# Altium PCB Face_HM1V0.PcbDoc
Units mm, origin at the board's own origin, x right, y up, seen from the top; angles counter-clockwise.
Board outline 54 x 13.7 mm, 2 copper layers (Top Layer, Bottom Layer), stack 1.571 mm thick; 18 components, 17 nets, 75 pads, 98 vias.
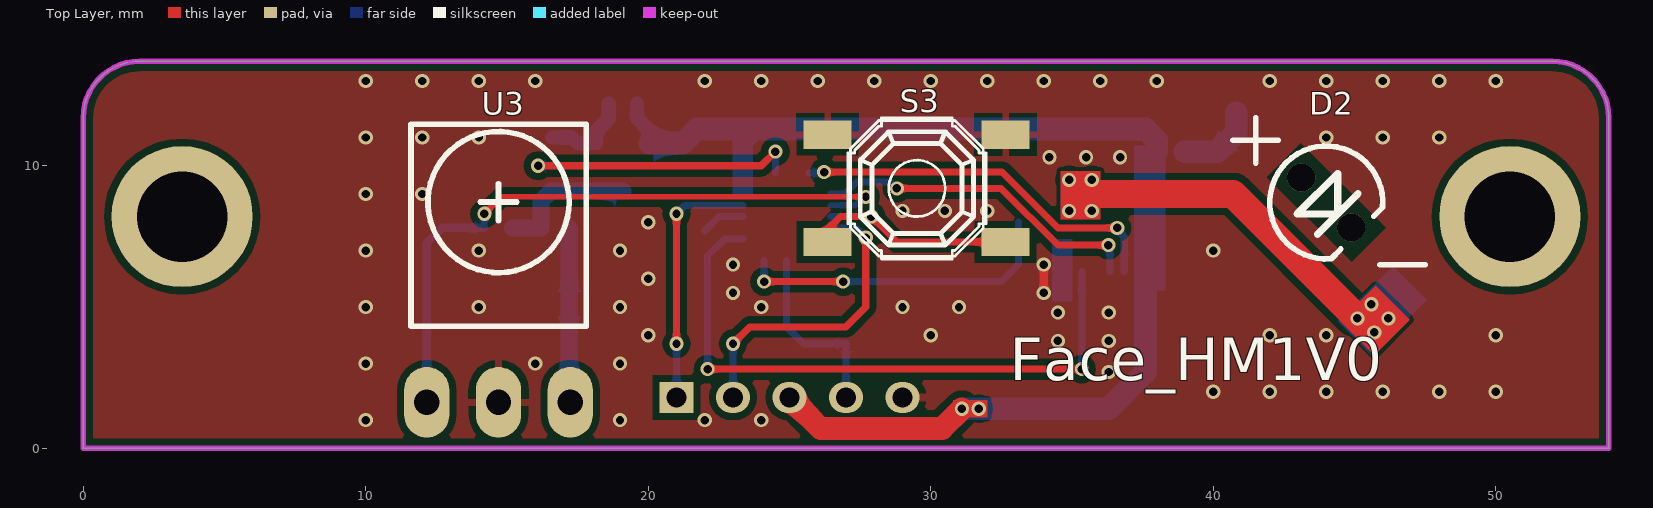
[diagram p0: Top Layer view]
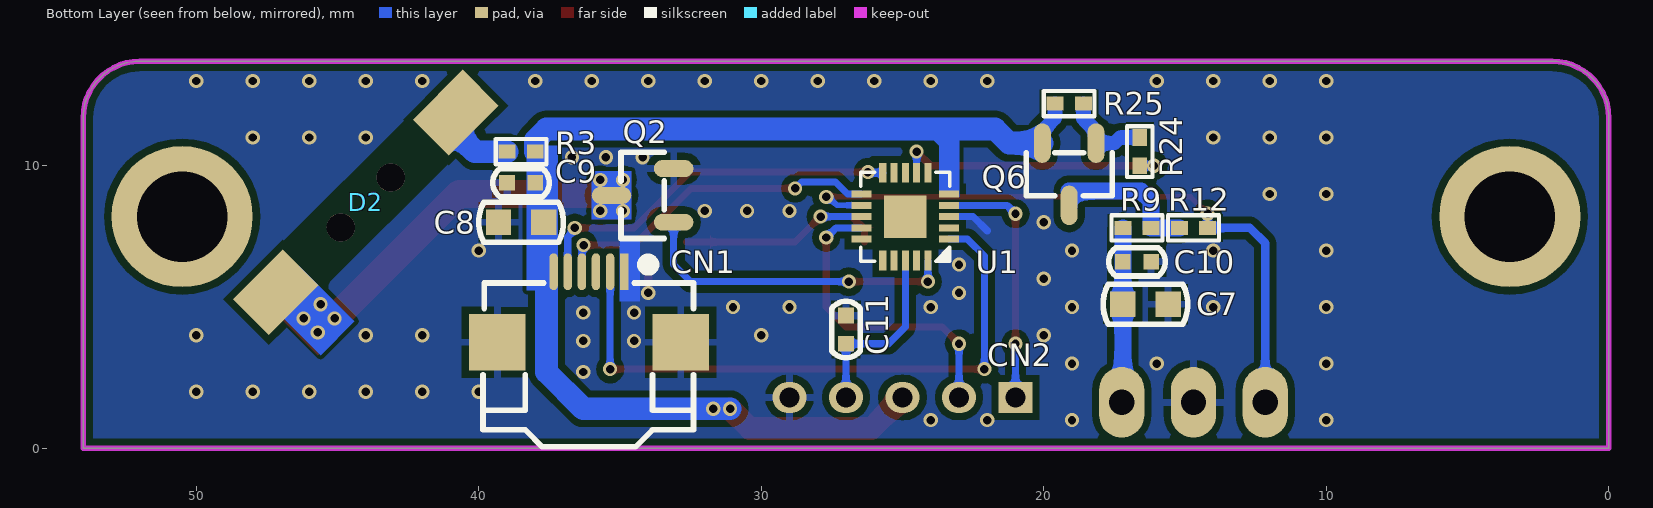
[diagram p1: Bottom Layer view, seen from below]

## Layer stack, top to bottom
Top Solder: solder mask 0.0102, Solder Resist, Dk 3.5
Top Layer: signal copper 0.0356
Dielectric 1: dielectric 1.5, FR-4, Dk 4.8
Bottom Layer: signal copper 0.0356
Bottom Solder: solder mask 0.0102, Solder Resist, Dk 3.5

## Board outline
0,0 54,0 54,11.7 ccw(c52,11.7) 52,13.7 2,13.7 ccw(c2,11.7) 0,11.7

## Design rules (kind name [scope] priority, off if disabled: settings)
Clearance [All] p1: gap=0.15 ignorepadtopadclearanceinfootprint=FALSE except(0.254: Arc-Poly Track-Poly SMDPad-Poly THPad-Poly Via-Poly Fill-Poly Poly-Poly)
ComponentClearance [All] p1: gap=0 collisioncheckmode=3 verticalgap=0 showdistances=FALSE
Height [All] p1: minheight=0 maxheight=30 prefheight=0
HoleSize [All] p1: absolutevalues=TRUE maxlimit=5 minlimit=0.025 maxpercent=80.000 minpercent=20.000
HoleToHoleClearance [All] p1: gap=0 allowstackedmicrovias=TRUE
MinimumSolderMaskSliver [All] p1: minsoldermaskwidth=0
PolygonConnect ViaPoly [IsVia] p1: connectstyle=Direct reliefconductorwidth=0.254 reliefentries=4 polygonreliefangle="90 Angle" airgapwidth=0.254
PolygonConnect [All] p2: connectstyle=Relief reliefconductorwidth=0.254 reliefentries=4 polygonreliefangle="90 Angle" airgapwidth=0.254
RoomDefinition Face_HM1V0 [InComponentClass('Face_HM1V0')] p1: confinementstyle=ConfineIn formatcopy=TRUE lockcomponents=FALSE outline 0,-1.3 54,-1.3 54,15.7 0,15.7
RoutingVias [All] p1: holewidth=0.3 width=0.5 viastyle="Through Hole" minholewidth=0.3 minwidth=0.5 maxholewidth=1 maxwidth=2
SilkToSilkClearance [All] p1: silktosilkclearance=0
SilkToSolderMaskClearance [IsPad] p1: minsilkscreentomaskgap=0 clearancetoexposedcopper=TRUE
SolderMaskExpansion viaSolderMask [IsVia] p1: expansion=0 istentingtop=FALSE
SolderMaskExpansion [All] p2: expansion=0.1 istentingtop=FALSE
UnRoutedNet [All] p1: checkbadconnections=TRUE
Width [All] p1: maxlimit=2 minlimit=0.2 preferedwidth=0.3
22 further rules are at their usual default settings.

## Components (designator, comment, footprint, x,y, rotation, side; value= is the part's Value field where it differs from the comment)
C7 "10uf ±10% 6.3V X7R 0603 ROSH ROHS" C0603 16.4,5.1 r0 bottom
C8 "10uf ±10% 6.3V X7R 0603 ROSH ROHS" C0603 38.5,8 r180 bottom
C9 "100nF/6.3V 10% 0402 X7R ROHS" C0402 38.5,9.4 r0 bottom
C10 "100nF/6.3V 10% 0402 X7R ROHS" C0402 16.7,6.6 r180 bottom
C11 "100nF/6.3V 10% 0402 X7R ROHS" C0402 27,4.2 r90 bottom
CN1 "NC/Header" HD2.0_5P 21,1.8 r0 bottom
CN2 "FPC6_0.5" FPC0.5_6P_STRAIGHT 37.1,5 r0 bottom
D2 "IR204C-A" "LD5.0_1 - duplicate" 44,8.7 r135 top
Q2 "SK2302AA" SOT-23-3 34.2,8.95 r90 bottom
Q6 "AO3400" SOT-23-3 19.1,9.7 r0 bottom
R3 "27R 5% 1/16W 0402 ROHS" R0402 38.5,10.5 r0 bottom
R9 "27R 5% 1/16W 0402 ROHS" R0402 16.7,7.8 r0 bottom
R12 "20K 5% 1/16W 0402 ROHS" R0402 14.7,7.8 r180 bottom
R24 "1K 5% 1/16W 0402 ROHS" R0402 16.6,10.5 r90 bottom
R25 "10K 5% 1/16W 0402 ROHS" R0402 19.1,12.2 r0 bottom
S3 "NC/5.2*5.2*1.5" "5.2X5.2X1.5 TACT SWITCH" 29.5,9.2 r180 top locked
U1 "N76E003AQ20(QFN20)" QFN20_3*3mm 24.9,8.2 r0 bottom
U3 "IRM-56384" "IRM-3638 - duplicate" 14.7,8.7 r0 top

## Footprints (in the part's own frame and the unit in brackets; to place one, negate y for a bottom-side part, rotate by r counter-clockwise, add the part's x,y. Pads: shape width x height; smd on the part's side, far side on the other; paste and mask are expansions set on the pad)
"5.2X5.2X1.5 TACT SWITCH" [mm]
  rect 1.7x1 smd: 1(-3.15,1.9) 2(3.15,1.9) 3(-3.15,-1.9) 4(3.15,-1.9)
  silkscreen extent -2.46,-2.5 2.44,2.5, body extent -3.3,-2.5 3.3,2.5, height 1.5
C0402 [mm] "Chip Capacitor, Body 1.0x0.5mm, IPC High Density"
  rect 0.55x0.55 smd: 1(-0.5,0) 2(0.5,0)
  silkscreen extent -1,-0.5 1,0.5, body extent -0.5,-0.3 0.5,0.3, height 0.2
C0603 [mm]
  rect 0.9x0.9 smd: 1(0.8,0) 2(-0.8,0)
  silkscreen extent -1.5,-0.71 1.5,0.71, body extent -0.8,-0.4 0.8,0.4, height 0.3
FPC0.5_6P_STRAIGHT [mm]
  rect 0.3x1.3 smd: 1(-2.25,-1.25)
  oval 0.3x1.3 smd: 2(-1.75,-1.25) 3(-1.25,-1.25) 4(-0.75,-1.25) 5(-0.25,-1.25) 6(0.25,-1.25)
  rect 2x2 smd: 7(-4.25,1.25) 8(2.25,1.25)
  silkscreen extent -4.7,-0.85 2.75,4.95
HD2.0_5P [mm]
  rect 1.2x1.1 hole 0.7: 1(0,0)
  oval 1.2x1.1 hole 0.7: 2(2,0) 3(4,0) 4(6,0) 5(8,0)
"IRM-3638 - duplicate" [mm]
  oval 1.6x2.5 hole 0.9: 1(-2.54,-7.075) 2(0,-7.075) 3(2.54,-7.075)
  silkscreen extent -3.1,-4.37 3.1,2.78, body extent -3,-7.47 3,2.38, height 6.16
"LD5.0_1 - duplicate" [mm]
  round 0.1 on Top Overlay: 5(0,0)
  rect 2.5x1.8 smd far side paste+0 mask+0: A(4.5,0) K(-4.5,0)
  round 1 hole 1 unplated: ""(-1.25,0) ""(1.25,0)
  Bottom Layer pour cut-out: -3.25,1.1 -3.25,-1.1 3.25,-1.1 3.25,1.1
  silkscreen extent -1.53,-2 2,2, body extent -1.5,-2 2,2, height 5.6
QFN20_3*3mm [mm]
  rect 0.7x0.25 smd mask+0.05: 1(-1.55,0.8) 2(-1.55,0.4) 3(-1.55,0) 4(-1.55,-0.4) 5(-1.55,-0.8) 11(1.55,-0.8) 12(1.55,-0.4) 13(1.55,0) 14(1.55,0.4) 15(1.55,0.8)
  rect 0.25x0.7 smd mask+0.05: 6(-0.8,-1.55) 7(-0.4,-1.55) 8(0,-1.55) 9(0.4,-1.55) 10(0.8,-1.55) 16(0.8,1.55) 17(0.4,1.55) 18(0,1.55) 19(-0.4,1.55) 20(-0.8,1.55)
  rect 1.5x1.5 smd mask+0.05: 21(0,0)
  round 0.5 on Bottom Overlay: ""(-2.05,1.7)
  silkscreen extent -1.58,-1.58 1.58,1.58, body extent -1.51,-1.51 1.51,1.51, height 0.75
R0402 [mm] "Chip Resistor, Body 1.0x0.5mm, IPC High Density"
  rect 0.6x0.5 smd: 1(-0.5,0) 2(0.5,0)
  silkscreen extent -0.9,-0.45 0.9,0.45, body extent -0.5,-0.25 0.5,0.25, height 0.35
SOT-23-3 [mm]
  oval 0.6x1.4 smd mask+0.05: 1(-0.95,-1.1) 2(0.95,-1.1) 3(0,1.1)
  silkscreen extent -1.52,-0.76 1.52,0.76, body extent -1.44,-1.44 1.46,1.36, height 1.3

## Part data
C7 C8: library part CAP, "10uf ±10% 6.3V X7R 0603 ROHS"
C9 C10 C11: library part CAP
CN1: library part Header5, "Header ,5pin", name1=NC/PH2.0-5P-DIP-180, Parameter 1=PH2.0-5P-SMD-Top, Parameter 2=PH2.0-5P-SMD-Side, 名称=弯针插座, 物料编号=ECZ02035, 规格，型号="PH 2Pin 间距2.0mm DIP/90°"
CN2: library part "Header 6"
D2: library part LED0
Q2: library part MOSFET-N
Q6: library part IRLML6402
R3 R9 R12 R24 R25: library part RES2
S3: library part "Tactile Switch KEY6x6", "Tactile Switch KEY6x6", LatestRevisionDate=17-Jul-2002, LatestRevisionNote="Re-released for DXP Platform.", Publisher="Altium Limited"
U1: library part N76E003AQ20, 名称=IC, 物料编号=EIC00048, 规格，型号="STM8S003F3 (TSSOP20)"
U3: library part "Header 3"

## Free pads (board coordinates)
  round 5 hole 3.2: 2(3.5,8.2) 3(50.5,8.2)

## Via types
v1: diameter 0.5, hole 0.3, Top Layer to Bottom Layer, tented both sides, 98 vias

## Nets (pads, with @x,y where several pads share a name; then routed paths per layer and width w, separated by ;. In a path a pad name is that pad's centre, name@x,y a point inside that pad or via, vN(x,y) a via of type N, cw(c..) or ccw(c..) an arc to the next point about the centre after c; other vN are vias at no path point)
GND: C7.2 C8.2 C9.2 C10.2 C11.2 CN1.5 CN2.1 CN2.7 CN2.8 Q2.2 S3.3 S3.4 U1.3 U3.2 | length 2.6
  Top Layer w0.3: v1(34,5.5) v1(34,6.5)
  Bottom Layer w0.25: 22,7.7 22.5,8.2 U1.3
  other v1: 10,1 19,1 22,1 24,1 40,2 42,2 44,2 46,2 48,2 50,2 36.3,2.7 10,3 16,3 19,3 34.5,3.8 36.3,3.8 20,4 30,4 42,4 44,4 50,4 34.5,4.8 36.3,4.8 10,5 14,5 19,5 24,5 29,5 31,5 23,5.5 20,6 23,6.5 10,7 14,7 19,7 40,7 20,8 29,8.4 30.5,8.4 32,8.4 10,9 12,9 34.2,10.3 35.5,10.3 36.7,10.3 10,11 12,11 14,11 44,11 46,11 48,11 10,13 12,13 14,13 16,13 22,13 24,13 26,13 28,13 30,13 32,13 34,13 36,13 38,13 42,13 44,13 46,13 48,13 50,13
HM_INT: CN2.2 U1.1 | length 22.2
  Top Layer w0.25: v1(22.1,2.8) v1(35.35,2.8)
  Bottom Layer w0.25: v1(22.1,2.8) 22.1,6.8 22.7,7.4 U1.1 ; v1(35.35,2.8) CN2.2
I2C_SCL: CN2.4 U1.11 | length 11.9
  Top Layer w0.25: v1(28.8,9.2) 32.489,9.2 34.499,7.19 v1(36.29,7.19)
  Bottom Layer w0.25: U1.11 26.95,9 27.375,9.425 28.575,9.425 v1(28.8,9.2) ; v1(36.29,7.19) 36.29,7.123 36.34,7.073 36.34,6.26 CN2.4
I2C_SDA: CN2.5 U1.10 | length 13.4
  Top Layer w0.25: v1(26.225,9.775) 32.525,9.775 34.5,7.8 v1(36.6,7.8)
  Bottom Layer w0.25: U1.10 26.2,9.75 v1(26.225,9.775) ; v1(36.6,7.8) 36.6,7.732 36.85,7.482 CN2.5
ICPCK: CN1.2 U1.14 | length 11
  Top Layer w0.25: v1(23,3.7) 23.6,4.3 27,4.3 27.7,5 v1(27.7,7.461)
  Bottom Layer w0.25: CN1.2 v1(23,3.7) ; U1.14 27.361,7.8 v1(27.7,7.461)
ICPDA: CN1.1 U1.4 | length 9
  Top Layer w0.25: v1(21,3.7) v1(21,8.3)
  Bottom Layer w0.25: CN1.1 v1(21,3.7) ; v1(21,8.3) 21.3,8.6 U1.4
IR-RX: R12.2 U1.12 U3.1 | length 23.5
  Top Layer w0.2: v1(14.2,8.3) 14.8,8.9 v1(27.7,8.9)
  Bottom Layer w0.2: R12.2 v1(14.2,8.3) ; U1.12 27.319,8.6 27.619,8.9 v1(27.7,8.9)
  Bottom Layer w0.3: U3.1 12.16,7.26 12.7,7.8 R12.2
IR_TX: Q2.1 U1.20 | length 11.5
  Top Layer w0.25: v1(24.1,5.9) v1(26.9,5.9)
  Bottom Layer w0.25: v1(24.1,5.9) U1.20 ; v1(26.9,5.9) 32.5,5.9 33.1,6.5 Q2.1
NetC7_1: C7.1 C10.1 R9.2 U3.3 | length 6.2
  Bottom Layer w0.6: R9.2 C10.1 C7.1 17.2,1.665 U3.3
NetD2_A: D2.A R3.2 | length 2.8
  Bottom Layer w0.8: R3.2 40.143,10.5 40.818,11.175 D2.A
NetD2_K: D2.K Q2.3 | length 11.1
  Top Layer w1: 35.7,9 40.7,9 v1@45,4.7
  other v1: 45.7,4.1 45.1,4.6 46.2,4.6 45.6,5.1 34.9,8.4 35.7,8.4 34.9,9.5 35.7,9.5
NetQ6_1: Q6.1 R24.2 R25.1 | length 3.2
  Bottom Layer w0.5: R24.2 17.3,11 17.5,10.8 Q6.1 18.15,11.227 18.6,11.677 R25.1
NetQ6_3: Q6.3 R9.1 R12.1 | length 5
  Bottom Layer w0.6: R12.1 R9.1 16.2,8.749 16.551,9.1 Q6.3@19.1,9.1
NRST: C11.1 CN1.4 U1.18 | length 6.6
  Bottom Layer w0.25: U1.18 24.9,4.3 25.5,3.7 C11.1 ; CN1.4 C11.1
RING: S3.1 S3.2 U1.13 | length 8.8
  Top Layer w0.25: S3.2 26.35,7.75 26.8,8.2 v1(27.9,8.2) 28.8,7.3 S3.1
  Bottom Layer w0.25: U1.13 v1(27.9,8.2)
RX_EN: R24.1 U1.7 | length 9.9
  Top Layer w0.25: v1(16.1,10) 24,10 v1(24.5,10.5)
  Bottom Layer w0.25: v1(16.1,10) R24.1 ; U1.7 v1(24.5,10.5)
VCC: C8.1 C9.1 CN1.3 CN2.6 Q6.2 R3.1 R25.2 U1.5 | length 39.1
  Top Layer w0.8: CN1.3 26.1,0.7 30.4,0.7 v1(31.1,1.4)
  Bottom Layer w0.5: R25.2 19.6,11.7 20.05,11.25 Q6.2 ; 37.7,9 37.7,9.7 38,10 38,10.2 R3.1
  Bottom Layer w0.8: Q6.2 21.225,10.8 21.725,11.3 23.4,11.3 37.6,11.3 38,10.9 R3.1 ; v1(31.1,1.4) v1(31.7,1.4) 36.3,1.4 37.6,2.7 37.6,6
pads on no net: CN2.3 D2. D2.5 U1. U1.2 U1.6 U1.8 U1.9 U1.15 U1.16 U1.17 U1.19 U1.21

## Polygon pours and split planes (outlines as drawn)
GND on Bottom Layer "Bottom Layer-GND" (solid, remove dead copper, pour order 2): 54,0 0,0 0,13.7 54,13.7
GND on Top Layer "Top Layer-GND" (solid, remove dead copper, pour order 0): 54,0 0,0 0,13.7 54,13.7

## Keep-outs
Keep-Out Layer:
  lines w0.2: 2,13.7 ccw(c2,11.7) 0,11.7 0,0 54,0 54,11.7 ccw(c52,11.7) 52,13.7 ; 2,13.7 2,13.7 ; 2,13.7 52,13.7 ; 52,13.7 52,13.7

## Other copper
Top Layer:
  region net NetD2_K: 45.75,5.75 44.5,4.5 45.7,3.3 46.95,4.55
  region net VCC: 32,1.1 30.8,1.1 30.8,1.7 32,1.7
  region net NetD2_K: 36,8.1 34.6,8.1 34.6,9.8 36,9.8
  pour cut-out: 46.1,7.8 43.1,10.8 41.9,9.6 44.9,6.6
Bottom Layer:
  region net GND: 35,7.4 35,5.2 34.3,5.2 34.3,7.4
  region net VCC: 23.7,8.9 23,8.9 23,11.4 23.9,11.4 23.9,10.9 23.7,10.7
  region net NetD2_K: 46.35,6.45 44.4,4.5 45.6,3.3 47.55,5.25
  region net NetD2_K: 36,8.1 34.6,8.1 34.6,9.8 36,9.8
  region net VCC: 37.2,5.6 38.3,5.6 38.3,10.7 37.2,10.7
  pour cut-out: 46.1,7.8 43.1,10.8 41.9,9.6 44.9,6.6

## Silkscreen, mask and mechanical layers (free items; w line width, h text height)
Top Overlay:
  lines w0.2: 40.7,10.9 42.3,10.9 ; 41.5,10.1 41.5,11.7 ; 45.9,6.5 47.5,6.5
  text "Face_HM1V0" at 32.8,2.4 h1.5
Bottom Overlay:
  circle w0.5: c34,6.5 r0.141
Mechanical 1:
  the board outline again, w0.2